# Altium PCB PCB1-sturing.PcbDoc
Units mm, origin at the board's own origin, x right, y up, seen from the top; angles counter-clockwise.
Board outline 210 x 71 mm, 2 copper layers (Top Layer, Bottom Layer), stack 1.671 mm thick; 81 components, 94 nets, 244 pads, 4 vias.
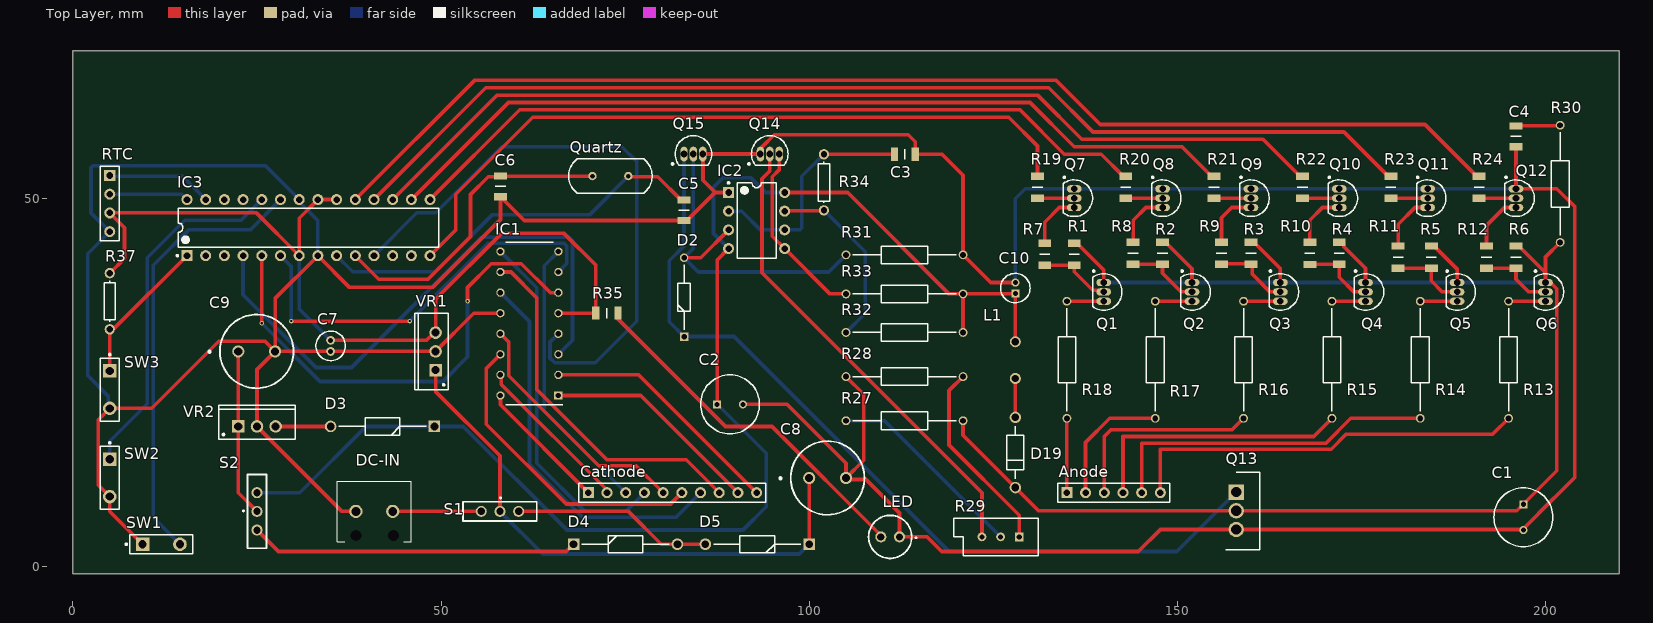
[diagram p0: Top Layer view]
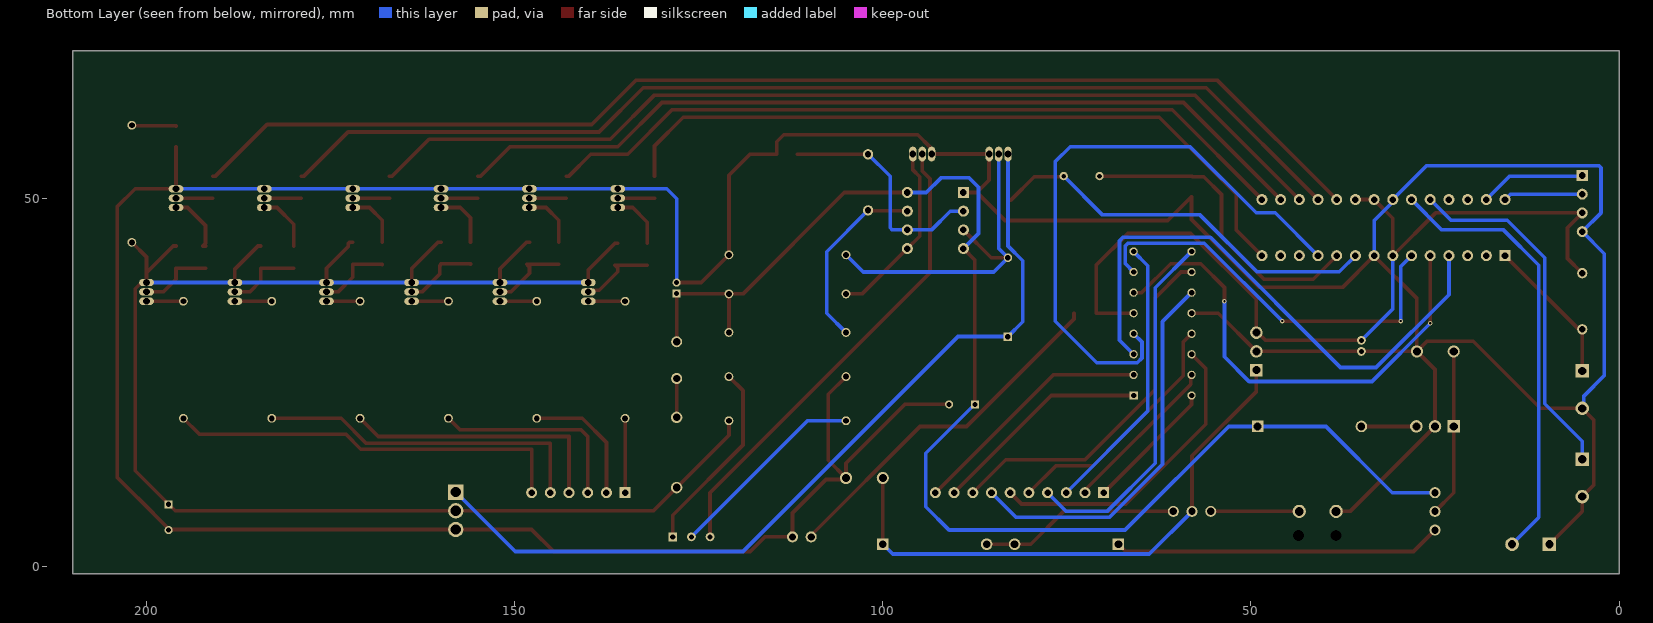
[diagram p1: Bottom Layer view, seen from below]
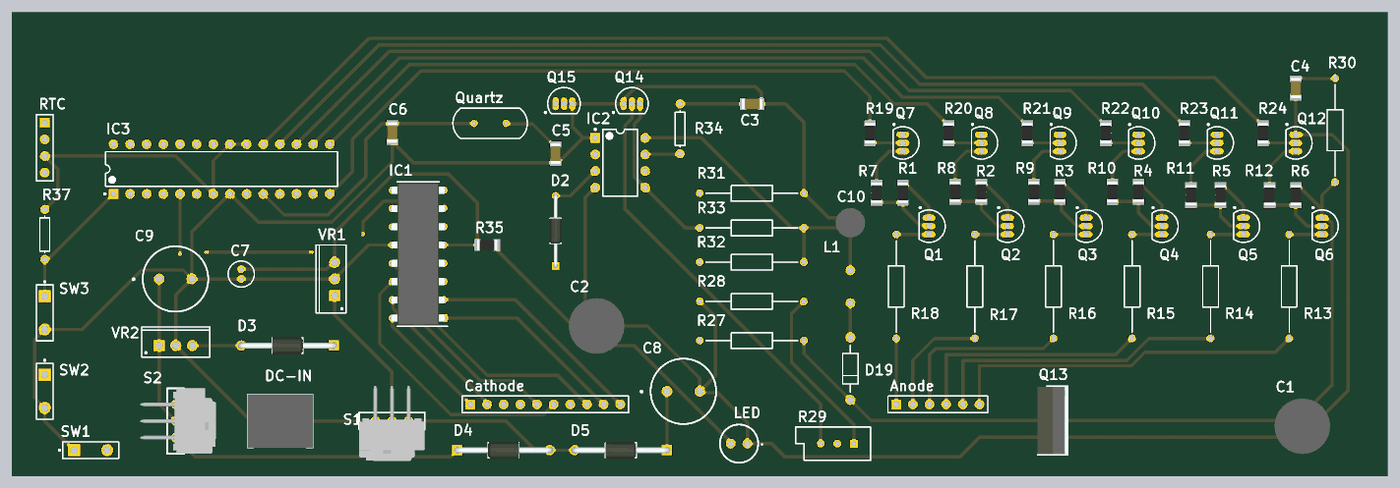
[diagram p2: 3D render of the assembled board from above, using the file's embedded part models]

## Layer stack, top to bottom
Top Solder: solder mask 0.0102, Solder Resist, Dk 3.5
Top Layer: signal copper 0.0356
Dielectric 1: dielectric 1.6, FR-4, Dk 4.8
Bottom Layer: signal copper 0.0356
Bottom Solder: solder mask 0.0102, Solder Resist, Dk 3.5

## Board outline
210,-1 0,-1 0,70 210,70

## Design rules (kind name [scope] priority, off if disabled: settings)
Clearance [All] p1: gap=0.3 ignorepadtopadclearanceinfootprint=TRUE
MinimumSolderMaskSliver [All] p1: minsoldermaskwidth=0.05
PolygonConnect [All] p1: connectstyle=Relief reliefconductorwidth=0.254 reliefentries=4 polygonreliefangle="90 Angle" airgapwidth=0.254
RoutingVias [All] p1: holewidth=0.3 width=0.6 viastyle="Through Hole" minholewidth=0.3 minwidth=0.6 maxholewidth=0.3 maxwidth=0.6
SMDNeckDown [All] p1: percent=60.000
SilkToSolderMaskClearance [IsPad] p1: minsilkscreentomaskgap=0.2 clearancetoexposedcopper=TRUE
SolderMaskExpansion [All] p1: expansion=0.102 istentingtop=FALSE
UnRoutedNet [All] p1: checkbadconnections=TRUE
Width [All] p1: maxlimit=1 minlimit=0.3 preferedwidth=0.5
27 further rules are at their usual default settings.

## Components (designator, comment, footprint, x,y, rotation, side; value= is the part's Value field where it differs from the comment)
Anode "Header 6" HDR1X6 135,10 r0 top
C1 "1uF 350V" CAPPRD350W52D800H1300 197,8.42 r270 top
C2 "470uF 25V" CAPPRD350W52D800H1300 87.5,22 r0 top
C3 "2n2" CAPC3216X95N 113,55.965 r0 top
C4 "47pF" CAPC3216X95N 196,58.4 r270 top
C5 "22pF" CAPC3216X95N 83,48.365 r270 top
C6 "22pF" CAPC3216X95N 58.063,51.6 r90 top
C7 "10uF 16V" ECE-A1CKS100 35,29.94 r180 top
C8 "100uF 50V" 860240675007 102.5,12 r0 top
C9 "100uF 50V" 860240675007 24.96,29.19 r0 top
C10 "10uF 25V" CAPPRD150W50D400H800 128,37.04 r90 top
Cathode "Header 10" HDR1X10 70,10 r0 top
D2 "1N914ATR" DIOAD1068W53L380D172 83,31.206 r90 top
D3 "1N4001" DIOAD1410W86L470D235 49.1,19 r180 top
D4 "1N4001" DIOAD1410W86L470D235 68,3 r0 top
D5 "1N4001" DIOAD1410W86L470D235 100,3 r180 top
D19 "MUR140" ONSC-AXIAL_LEAD-2-59-10_P 128,15.46 r90 top
DC-IN "282836-2" 2828362 38.43,7.46 r0 top
IC1 "SN74141" DIP787W53P279L2176H508Q16N 62,32.984 r180 top
IC2 "NE555P" P0008A 92.86,46.965 r0 top
IC3 "ATmega8-16PU" 28P3 32,46 r90 top
L1 "100 uH 1A" WE-TI_8012B89 128,28 r90 top
LED "HLMP-3301" HLMP-3301 111,4 r90 top
Q1 "MPSA42" TO-92A 140,37.27 r180 top
Q2 "MPSA42" TO-92A 152,37.27 r180 top
Q3 "MPSA42" TO-92A 164,37.27 r180 top
Q4 "MPSA42" TO-92A 175.56,37.27 r180 top
Q5 "MPSA42" TO-92A 188,37.27 r180 top
Q6 "MPSA42" TO-92A 200,37.27 r180 top
Q7 "MPSA42" TO-92A 136,50 r180 top
Q8 "MPSA42" TO-92A 148,50 r180 top
Q9 "MPSA42" TO-92A 160,50 r180 top
Q10 "MPSA42" TO-92A 172,50 r180 top
Q11 "MPSA42" TO-92A 184,50 r180 top
Q12 "MPSA42" TO-92A 196,50 r180 top
Q13 "IRF730" TO254P465X1024X1989-3P 158,10.08 r270 top
Q14 "BC547" TO-92A 94.645,56 r270 top
Q15 "MPSA55" TO-92A 84.27,56 r270 top
Quartz "M16000" FOXSLF/200-20 73,53 r0 top
R1 "100K" RESC3116X65N 136,42.382 r270 top
R2 "100K" RESC3116X65N 148,42.536 r270 top
R3 "100K" RESC3116X65N 160,42.536 r270 top
R4 "100K" RESC3116X65N 172,42.536 r270 top
R5 "100K" RESC3116X65N 184.5,42 r270 top
R6 "100K" RESC3116X65N 196,42 r270 top
R7 "470K" RESC3116X65N 132,42.382 r90 top
R8 "470K" RESC3116X65N 144,42.536 r90 top
R9 "470K" RESC3116X65N 156,42.536 r90 top
R10 "470K" RESC3116X65N 168,42.5 r90 top
R11 "470K" RESC3116X65N 180,42 r90 top
R12 "470K" RESC3116X65N 192,42 r90 top
R13 "15K" RESAD1590W60L630D240 195,36 r270 top
R14 "15K" RESAD1590W60L630D240 183,36 r270 top
R15 "15K" RESAD1590W60L630D240 171,36 r270 top
R16 "15K" RESAD1590W60L630D240 159,36 r270 top
R17 "15K" RESAD1590W60L630D240 147,36 r270 top
R18 "15K" RESAD1590W60L630D240 135,36 r270 top
R19 "33K" RESC3116X65N 131,51.5 r90 top
R20 "33K" RESC3116X65N 143,51.5 r90 top
R21 "33K" RESC3116X65N 155,51.5 r90 top
R22 "33K" RESC3116X65N 167,51.5 r90 top
R23 "33K" RESC3116X65N 179,51.5 r90 top
R24 "33K" RESC3116X65N 191,51.5 r90 top
R27 "220K" RESAD1590W60L630D240 120.9,19.763 r180 top
R28 "470K" RESAD1590W60L630D240 120.9,25.763 r180 top
R29 "RPot" VR5 126,4 r180 top value=1K
R30 "1K" RESAD1590W60L630D240 202,44 r90 top
R31 "1K" RESAD1590W60L630D240 105,42.303 r0 top
R32 "1K" RESAD1590W60L630D240 120.9,31.763 r180 top
R33 "33K" RESAD1590W60L630D240 120.9,37 r180 top
R34 "Res1" AXIAL-0.3 102,52.155 r270 top value=10k
R35 "220" RESC3116X65N 72.531,34.381 r0 top
R37 "Res1" AXIAL-0.3 5,36 r270 top value=1K
RTC "Header 4" HDR1X4 5,53.08 r270 top
S1 "on/sleep" NK236 58,7.46 r180 top
S2 "12-35V/9V" NK236 25,7.46 r270 top
SW1 "SW-PB" SPST-2 12,3 r0 top
SW2 "SW-PB" SPST-2 5,12 r270 top
SW3 "SW-PB" SPST-2 5,24 r270 top
VR1 "L7805ACV" TO220 49.26,29.19 r90 top
VR2 "L7809CV" TO220 25,19 r0 top

## Footprints (in the part's own frame and the unit in brackets; to place one, negate y for a bottom-side part, rotate by r counter-clockwise, add the part's x,y. Pads: shape width x height; smd on the part's side, far side on the other; paste and mask are expansions set on the pad)
28P3 [mm] "28-Pin Plastic Dual In-Line Package (PDIP)"
  rect 1.5x1.5 hole 0.9: 1(-3.81,16.51)
  round 1.5 hole 0.9: 2(-3.81,13.97) 3(-3.81,11.43) 4(-3.81,8.89) 5(-3.81,6.35) 6(-3.81,3.81) 7(-3.81,1.27) 8(-3.81,-1.27) 9(-3.81,-3.81) 10(-3.81,-6.35) 11(-3.81,-8.89) 12(-3.81,-11.43) 13(-3.81,-13.97) 14(-3.81,-16.51) 15(3.81,-16.51) 16(3.81,-13.97) 17(3.81,-11.43) 18(3.81,-8.89) 19(3.81,-6.35) 20(3.81,-3.81) 21(3.81,-1.27) 22(3.81,1.27) 23(3.81,3.81) 24(3.81,6.35) 25(3.81,8.89) 26(3.81,11.43) 27(3.81,13.97) 28(3.81,16.51)
  silkscreen extent -3.93,-17.7 2.65,17.93, body extent -3.6,-17.65 3.6,17.65, height 4.58
2828362 [mm]
  round 1.8 hole 1.2: 1(0,0) 2(5,0)
  round 0.75 hole 1.5: MH1(0,-3.3) MH2(5.08,-3.3)
  silkscreen extent -2.5,-4.1 7.5,4.1, body extent -2.5,-4.1 7.5,4.1, height 10.2
860240675007 [mm]
  round 1.65 hole 1.1: 1(-2.5,0) 2(2.5,0)
  silkscreen extent -6.55,-5 5,5
AXIAL-0.3 [mm] "Axial Device, Thru-Hole; 2 Leads; 0.3 in Pin Spacing"
  round 1.4 hole 0.85: 1(-3.81,0) 2(3.81,0)
  silkscreen extent -2.77,-0.76 2.77,0.76
CAPC3216X95N [mm]
  rect 0.99x1.78 smd: 1(-1.4,0) 2(1.4,0)
  silkscreen extent 0,-0.7 0,0.7, body extent -1.6,-0.8 1.6,0.8, height 0.95
CAPPRD150W50D400H800 [mm]
  rect 1.1x1.1 hole 0.7: 1(0,0)
  round 1.1 hole 0.7: 2(1.5,0)
  silkscreen extent -1.25,-2 2.75,2, body extent -1.5,-2.25 3,2.25, height 8
CAPPRD350W52D800H1300 [mm]
  rect 1.1x1.1 hole 0.7: 1(0,0)
  round 1.1 hole 0.7: 2(3.5,0)
  silkscreen extent -2.25,-4 5.75,4, body extent -2.5,-4.25 6,4.25, height 13
DIOAD1068W53L380D172 [mm]
  rect 1.15x1.15 hole 0.75: 1(0,0)
  round 1.15 hole 0.75: 2(10.7,0)
  silkscreen extent 0.92,-0.86 9.78,0.86, body extent -0.26,-0.95 10.95,0.95, height 1.9
DIOAD1410W86L470D235 [mm]
  rect 1.575x1.575 hole 1.05: 1(0,0)
  round 1.575 hole 1.05: 2(14.1,0)
  silkscreen extent 1.14,-1.18 12.96,1.18, body extent -0.43,-1.35 14.53,1.35, height 2.69
DIP787W53P279L2176H508Q16N [mil]
  rect 44.61x44.61 hole 28.86: 1(-155,385)
  round 44.61 hole 28.86: 2(-155,275) 3(-155,165) 4(-155,55) 5(-155,-55) 6(-155,-165) 7(-155,-275) 8(-155,-385) 9(155,-385) 10(155,-275) 11(155,-165) 12(155,-55) 13(155,55) 14(155,165) 15(155,275) 16(155,385)
  silkscreen extent -177,-435 127,435, body extent -160,-428 160,428, height 200
ECE-A1CKS100 [mm]
  round 1.2 hole 0.7: 1(0,-0.75) 2(0,0.75)
  silkscreen extent -2,-2 2,2
FOXSLF/200-20 [mm]
  round 1.13 hole 0.63: 1(-2.44,0) 2(2.44,0)
  silkscreen extent -5.68,-2.33 5.68,2.33
HDR1X4 [mm] "Connector; Header; 4 Position"
  rect 1.5x1.5 hole 0.9: 1(0,0)
  round 1.5 hole 0.9: 2(2.54,0) 3(5.08,0) 4(7.62,0)
  silkscreen extent -1.27,-1.27 8.89,1.27
HDR1X6 [mm] "Connector; Header; 6 Position"
  rect 1.5x1.5 hole 0.9: 1(0,0)
  round 1.5 hole 0.9: 2(2.54,0) 3(5.08,0) 4(7.62,0) 5(10.16,0) 6(12.7,0)
  silkscreen extent -1.27,-1.27 13.97,1.27
HDR1X10 [mm] "Connector; Header; 10 Position"
  rect 1.5x1.5 hole 0.9: 1(0,0)
  round 1.5 hole 0.9: 2(2.54,0) 3(5.08,0) 4(7.62,0) 5(10.16,0) 6(12.7,0) 7(15.24,0) 8(17.78,0) 9(20.32,0) 10(22.86,0)
  silkscreen extent -1.27,-1.27 24.13,1.27
HLMP-3301 [mm]
  round 1.5 hole 0.98: 1(0,-1.27) 2(0,1.27)
  silkscreen extent -2.92,-3.56 2.92,2.92
NK236 [mm]
  round 1.5 hole 1: 1(0,0) 2(-2.54,0) 3(2.54,0)
  silkscreen extent -5,-1.91 5,1.3, body extent -5,-5.4 5,6.1, height 1.3
ONSC-AXIAL_LEAD-2-59-10_P [mm] "AXIAL, 2-Leads, Diameter 2.35mm"
  round 1.55 hole 1.05: 1(-4.77,0) 2(4.77,0)
  silkscreen extent -3.6,-1.17 3.6,1.18
P0008A [mm] "DIP, 8-Leads, Body 10.15x6.6mm, Pitch 2.54mm"
  rect 1.5x1.5 hole 0.9: 1(-3.81,3.81)
  round 1.5 hole 0.9: 2(-3.81,1.27) 3(-3.81,-1.27) 4(-3.81,-3.81) 5(3.81,-3.81) 6(3.81,-1.27) 7(3.81,1.27) 8(3.81,3.81)
  silkscreen extent -3.93,-5.1 2.65,5.23, body extent -3.95,-5.07 3.95,5.07, height 5.08
RESAD1590W60L630D240 [mm]
  round 1.2 hole 0.8: 1(0,0) 2(15.9,0)
  silkscreen extent 0.95,-1.2 14.95,1.2, body extent 0,0 0,0
RESC3116X65N [mm]
  rect 1x1.75 smd: 1(-1.5,0) 2(1.5,0)
  silkscreen extent 0,-0.7 0,0.7, body extent -1.55,-0.8 1.55,0.8, height 0.65
SPST-2 [mm] "Switch; 2 Leads"
  rect 1.85x1.85 hole 1.1: 1(-2.54,0)
  round 1.85 hole 1.1: 2(2.54,0)
  silkscreen extent -4.89,-1.27 4.28,1.27
TO220 [mm] "TO, Thru-Hole, Vertical, Heatsink Mounted; 3 In-Line Leads; Pitch 2.54 mm"
  rect 1.7x1.7 hole 1.1: 1(-2.54,0)
  round 1.7 hole 1.1: 2(0,0) 3(2.54,0)
  silkscreen extent -5.2,-1.75 5.2,2.85, body extent -5.25,-1.8 5.25,2.9, height 19.7
TO254P465X1024X1989-3P [mm]
  rect 2.085x2.085 hole 1.39: 1(0,0)
  round 2.085 hole 1.39: 2(2.54,0) 3(5.08,0)
  silkscreen extent -2.72,-1.42 7.8,3.22, body extent -2.58,-1.43 7.66,3.22, height 18.77
TO-92A [mm] "TO, Flat Index; 3 In-Line, Axial Leads; Body Dia. 4.5mm; Leads 0.51 x 0.48 mm (max)"
  oval 2x1 hole 0.9: 1(0,-1.27) 2(0,0) 3(0,1.27)
  silkscreen extent -2.48,-2.95 1.5,2.48, body extent -2.48,-2.5 1.5,2.5, height 6.86
VR5 [mm] "Thru-Hole; 3 Leads"
  rect 1.2x1.2 hole 0.7: 1(-2.54,0)
  round 1.2 hole 0.7: 2(0,0) 3(2.54,0)
  silkscreen extent -5.08,-2.54 6.35,2.54
WE-TI_8012B89 [mm]
  round 1.5 hole 1: 1(-2.5,0) 2(2.5,0)

## Part data
Anode: "Header, 6-Pin", LatestRevisionDate=17-Jul-2002, LatestRevisionNote="Re-released for DXP Platform.", Publisher="Altium Limited"
C1 C2: library part 860131274001, "Capacitor Polarised", Manufacturer_Name="Wurth Elektronik", Mouser Part Number=710-860131274001, RS Part Number=1636251, Datasheet Link=http://katalog.we-online.com/pbs/datasheet/860131274001.pdf, Height=13mm, Manufacturer_Part_Number=860131274001, Mouser Price/Stock=https://www.mouser.com/Search/Refine.aspx?Keyword=710-860131274001, RS Price/Stock=http://uk.rs-online.com/web/p/products/1636251
C3: library part CC1206KRX7R9BB471, "Capacitor", Manufacturer_Name="YAGEO (PHYCOMP)", Mouser Part Number=603-CC126KRX7R9BB471, Datasheet Link=https://componentsearchengine.com/Datasheets/1/CC1206KRX7R9BB471.pdf, Height=0.95mm, Manufacturer_Part_Number=CC1206KRX7R9BB471, Mouser Price/Stock=https://www.mouser.com/Search/Refine.aspx?Keyword=603-CC126KRX7R9BB471
C4 C5 C6: library part CC1206JRNPO9BN220, "Capacitor", Manufacturer_Name="YAGEO (PHYCOMP)", Datasheet Link=http://uk.rs-online.com/web/p/products/6698482, Height=0.95mm, Manufacturer_Part_Number=CC1206JRNPO9BN220
C7: library part ECE-A1CKS100, "Capacitor", Manufacturer_Name=Panasonic, Mouser Part Number=667-ECE-A1CKS100, Allied_Number=70067880, Allied Price/Stock=http://www.alliedelec.com/panasonic-ecea1cks100/70067880/, Datasheet Link=http://www.mouser.com/ds/2/315/ABA0000C1050-951367.pdf, Manufacturer_Part_Number=ECE-A1CKS100, Mouser Price/Stock=https://www.mouser.com/Search/Refine.aspx?Keyword=667-ECE-A1CKS100
C8 C9: library part 860240675007, "Capacitor", Manufacturer_Name="Wurth Elektronik", Mouser Part Number=710-860240675007, RS Part Number=1636310, Datasheet Link=http://uk.rs-online.com/webdocs/135a/0900766b8135acdf.pdf, Manufacturer_Part_Number=860240675007, Mouser Price/Stock=https://www.mouser.com/Search/Refine.aspx?Keyword=710-860240675007, RS Price/Stock=http://uk.rs-online.com/web/p/products/1636310
C10: library part EEA-FC1E100, "Capacitor Polarised", Manufacturer_Name=Panasonic, Mouser Part Number=667-EEA-FC1E100, Allied_Number=70256144, Allied Price/Stock=https://www.alliedelec.com/panasonic-eea-fc1e100/70256144/, Datasheet Link=https://industrial.panasonic.com/cdbs/www-data/pdf/RDF0000/ABA0000C1209.pdf, Height=8mm, Manufacturer_Part_Number=EEA-FC1E100, Mouser Price/Stock=https://www.mouser.com/Search/Refine.aspx?Keyword=667-EEA-FC1E100
Cathode: "Header, 10-Pin", LatestRevisionDate=17-Jul-2002, LatestRevisionNote="Re-released for DXP Platform.", Publisher="Altium Limited"
D2: "Diode", Manufacturer_Name="Fairchild Semiconductor", Mouser Part Number=512-1N914ATR, RS Part Number=7044004P, Datasheet Link=https://www.fairchildsemi.com/datasheets/1N/1N914A.pdf, Manufacturer_Part_Number=1N914ATR, Mouser Price/Stock=https://www.mouser.com/Search/Refine.aspx?Keyword=512-1N914ATR, RS Price/Stock=http://uk.rs-online.com/web/p/products/7044004P
D3 D4 D5: "Diode", Manufacturer_Name=MULTICOMP, Datasheet Link=http://www.farnell.com/datasheets/58590.pdf, Manufacturer_Part_Number=1N4001
D19: library part CMP-0902-00130-1, "SWITCHMODE(TM) Power Rectifier, 2-Pin Axial_Lead, Pb-Free, Bulk Box", Manufacturer="On Semiconductor", ComponentLink1Description="Manufacturer URL", ComponentLink1URL=http://www.onsemi.com/, ComponentLink2Description=Datasheet, ComponentLink2URL=http://www.onsemi.com/pub_link/Collateral/MUR120-D.PDF, ComponentLink3Description="Package Specification", ComponentLink3URL=http://www.onsemi.cn/pub_link/Collateral/59-10.PDF, DatasheetVersion="Rev. 12", IFSM Max (A)=35, Mounting Technology="Through Hole", PackageDescription="2-Pin, Axial Lead, Diameter 2.35 mm", PackageReference=AXIAL_LEAD-2-59-10, PackageVersion="Rev. U, 02/2005", Packing="Bulk Box", PartNumber=MUR140, RoHS=TRUE, Type=Ultrafast, VRRM Max (V)=400
DC-IN: "Connector", Manufacturer_Name="TE CONNECTIVITY / BUCHANAN", Allied_Number=70086275, Allied Price/Stock=https://www.alliedelec.com/teconnectivity-282836-2/70086275/, Datasheet Link=https://www.te.com/commerce/DocumentDelivery/DDEController?Action=showdoc&DocId=Customer+Drawing%7F282836%7FJ%7Fpdf%7FEnglish%7FENG_CD_282836_J.pdf%7F282836-2, Height=10.2mm, Manufacturer_Part_Number=282836-2
IC1: "Integrated Circuit", Manufacturer_Name="Texas Instruments", Datasheet Link=http://pdf1.alldatasheet.com/datasheet-pdf/view/115763/TI/SN74141.html, Height=5.08mm, Manufacturer_Part_Number=SN74141
IC2: library part CMP-2000-04954-1, "Precision Timer, 4.5 to 16 V, 0 to 70 degC, 8-Pin DIP, Pb-Free, Tube", Manufacturer=TexasInstruments, Maximum High Level Output Current=-200mA, Maximum Low Level Output Current=200mA, Operating Supply Voltage=5, Package=8PDIP, Package Description="8-Pin Double In-line Package, Body 9.59 x 6.35 mm, Pitch 2.54 mm", Package Reference=P8, Category=Timer, Datasheet URL=http://www.ti.com/general/docs/lit/getliterature.tsp?genericPartNumber=NE555&fileType=pdf, Datasheet Version="Rev. I, 09/2014", Manufacturer URL=http://www.ti.com/, Number of Internal Timers=1, Package URL=http://www.ti.com/lit/ml/mpdi001b/mpdi001b.pdf, Packaging=Rail/Tube, Rad Hard=No, Type=Standard
IC3: library part CMP-0095-00372-1, "8-bit AVR Microcontroller, 4.5-5.5V, 16MHz, 8KB Flash, 512 Bytes EEPROM, 1KB SRAM, 28-pin PDIP, Industrial Grade (-40°C to 85°C)", ComponentLink1Description="Manufacturer URL", ComponentLink1URL=http://www.atmel.com/, ComponentLink2Description=ATmega8(L), ComponentLink2URL=http://www.atmel.com/dyn/resources/prod_documents/doc2486.pdf, ComponentLink3Description="ATmega8(L) Summary", ComponentLink3URL=http://www.atmel.com/dyn/resources/prod_documents/2486S.pdf, DatasheetVersion="revZ, Feb-2011", PackageDescription="28-lead (0.300\"/7.62mm Wide) Plastic Dual Inline Package (PDIP)", PackageReference=28P3, PackageVersion="revB, Sep-2001"
L1: library part 744743101, "Inductor", Manufacturer_Name="Wurth Elektronik", RS Part Number=4890071, Manufacturer_Part_Number=744743101, RS Price/Stock=http://uk.rs-online.com/web/p/products/4890071
LED: "LED", Manufacturer_Name="Avago Technologies", Mouser Part Number=630-HLMP-3301, RS Part Number=1783094, Datasheet Link=https://docs.broadcom.com/docs/AV02-1558EN, Manufacturer_Part_Number=HLMP-3301, Mouser Price/Stock=https://www.mouser.com/Search/Refine.aspx?Keyword=630-HLMP-3301, RS Price/Stock=http://uk.rs-online.com/web/p/products/1783094
Q1 Q2 Q3 Q4 Q5 Q6 Q15: library part 2N3906, "PNP General Purpose Amplifier", ComponentLink1Description="Manufacturer Link", ComponentLink1URL=http://www.fairchildsemi.com/, ComponentLink2Description=Datasheet, ComponentLink2URL=http://www.fairchildsemi.com/ds/2N%2F2N3906.pdf, DatasheetVersion=1997, LatestRevisionDate=15-Jan-2003, LatestRevisionNote="PCB Footprint 'BCY-W3/D4.7' replaced", PackageDescription="TO, Flat Index; 3 In-Line, Axial Leads; Body Dia. 4.5mm; Leads 0.51 x 0.48 mm (max)", PackageReference=TO-92A, PackageVersion=Sep-1998, Published=8-Jun-2000, Publisher="Altium Limited"
Q7 Q8 Q9 Q10 Q11 Q12 Q14: library part 2N3904, "NPN General Purpose Amplifier", ComponentLink1Description="Manufacturer Link", ComponentLink1URL=http://www.fairchildsemi.com/, ComponentLink2Description=Datasheet, ComponentLink2URL=http://www.fairchildsemi.com/ds/2N%2F2N3904.pdf, DatasheetVersion=1997, LatestRevisionDate=15-Jan-2003, LatestRevisionNote="PCB Footprint 'BCY-W3/D4.7' replaced", PackageDescription="TO, Flat Index; 3 In-Line, Axial Leads; Body Dia. 4.5mm; Leads 0.51 x 0.48 mm (max)", PackageReference=TO-92A, PackageVersion=Sep-1998, Published=8-Jun-2000, Publisher="Altium Limited"
Q13: "Transistor", Manufacturer_Name=STMicroelectronics, Mouser Part Number=511-IRF730, Datasheet Link=https://componentsearchengine.com/Datasheets/1/IRF730.pdf, Height=4.65mm, Manufacturer_Part_Number=IRF730, Mouser Price/Stock=https://www.mouser.com/Search/Refine.aspx?Keyword=511-IRF730
Quartz: library part FOXSLF_080, "Crystal or Oscillator", Manufacturer_Name=Fox, Manufacturer_Part_Number=FOXSLF/080, Mouser Part Number=559-FOXS080-LF, RS Part Number=1734724, Datasheet Link=https://www.foxonline.com/pdfs/C4ST.pdf, Mouser Price/Stock=https://www.mouser.com/Search/Refine.aspx?Keyword=559-FOXS080-LF, RS Price/Stock=http://uk.rs-online.com/web/p/products/1734724
R1 R2 R3 R4 R5 R6 R7 R8 R9 R10 R11 R12 R19 R20 R21 R22 R23 R24 R35: library part RC1206JR-07_10KL, "Resistor", Manufacturer_Name="YAGEO (PHYCOMP)", Manufacturer_Part_Number="RC1206JR-07 10KL", Datasheet Link=https://www.sos.sk/productdata/35/10/4/35104/RC1206.pdf, Height=0.65mm
R13 R14 R15 R16 R17 R18 R27 R28 R30 R31 R32 R33: library part MF0207FTE52-10K, "Resistor", Manufacturer_Name="YAGEO (PHYCOMP)", Mouser Part Number=603-MF0207FTE52-10K, Datasheet Link="http://www.mouser.com/ds/2/447/Yageo LR_MF0_2013-775182.pdf", Manufacturer_Part_Number=MF0207FTE52-10K, Mouser Price/Stock=https://www.mouser.com/Search/Refine.aspx?Keyword=603-MF0207FTE52-10K
R29: "Potentiometer", LatestRevisionDate=17-Jul-2002, LatestRevisionNote="Re-released for DXP Platform.", PackageDescription="Variable Resistor, Thru-Hole; 3 Leads", PackageReference=VR5, Published=8-Jun-2000, Publisher="Altium Limited", Set Position=0.5, Sim Note="Enter the Resistance value and the set point into parameter fields."
R34 R37: "Resistor", LatestRevisionDate=17-Jul-2002, LatestRevisionNote="Re-released for DXP Platform.", PackageDescription="Axial Device, Thru-Hole; 2 Leads; 0.3 in Pin Spacing", PackageReference=AXIAL-0.3, Published=8-Jun-2000, Publisher="Altium Limited"
RTC: "Header, 4-Pin", LatestRevisionDate=17-Jul-2002, LatestRevisionNote="Re-released for DXP Platform.", Publisher="Altium Limited"
S1 S2: library part NK236, "Switch", Manufacturer_Name=Apem, Mouser Part Number=642-NK236, RS Part Number=1810038, Datasheet Link=https://componentsearchengine.com/Datasheets/1/NK236.pdf, Manufacturer_Part_Number=NK236, Mouser Price/Stock=https://www.mouser.com/Search/Refine.aspx?Keyword=642-NK236, RS Price/Stock=http://uk.rs-online.com/web/p/products/1810038
SW1 SW2 SW3: "Switch", LatestRevisionDate=17-Jul-2002, LatestRevisionNote="Re-released for DXP Platform.", PackageDescription="Switch; 2 Leads", PackageReference=SPST-2, Published=24-Mar-1999, Publisher="Altium Limited"
VR1: library part CMP-0244-00484-1, "Positive Voltage Regulator, 5V, 3-Pin TO-220", ComponentLink1Description="Manufacturer URL", ComponentLink1URL=http://www.st.com, ComponentLink2Description=Datasheet, ComponentLink2URL=http://www.st.com/internet/com/TECHNICAL_RESOURCES/TECHNICAL_LITERATURE/DATASHEET/CD00000444.pdf, ComponentLink3Description="Package Specification", ComponentLink3URL=http://www.st.com/internet/com/TECHNICAL_RESOURCES/TECHNICAL_LITERATURE/PACKAGE_INFORMATION/CD00004649.pdf, DatasheetVersion=16/11/2011, PackageDescription="TO, Thru-Hole, Vertical, Heatsink Mounted; 3 In-Line Leads; Pitch 2.54 mm", PackageReference=TO220, PackageVersion=ver3.0
VR2: library part CMP-0244-00459-1, "Positive Voltage Regulator, 9V, 3-Pin TO-220", ComponentLink1Description="Manufacturer URL", ComponentLink1URL=http://www.st.com, ComponentLink2Description=Datasheet, ComponentLink2URL=http://www.st.com/internet/com/TECHNICAL_RESOURCES/TECHNICAL_LITERATURE/DATASHEET/CD00000444.pdf, ComponentLink3Description="Package Specification", ComponentLink3URL=http://www.st.com/internet/com/TECHNICAL_RESOURCES/TECHNICAL_LITERATURE/PACKAGE_INFORMATION/CD00004649.pdf, DatasheetVersion=16/11/2011, PackageDescription="TO, Thru-Hole, Vertical, Heatsink Mounted; 3 In-Line Leads; Pitch 2.54 mm", PackageReference=TO220, PackageVersion=ver3.0

## Via types
v1: diameter 0.6, hole 0.3, Top Layer to Bottom Layer, 4 vias

## Nets (pads, with @x,y where several pads share a name; then routed paths per layer and width w, separated by ;. In a path a pad name is that pad's centre, name@x,y a point inside that pad or via, vN(x,y) a via of type N, cw(c..) or ccw(c..) an arc to the next point about the centre after c; other vN are vias at no path point)
1: C1.2 C2.2 C3.2 C4.2 C5.2 C6.1 C7.2 C8.2 C9.2 C10.2 DC-IN.1 IC1.12 IC2.1 IC3.8 IC3.22 LED.1 Q7.1 Q8.1 Q9.1 Q10.1 Q11.1 Q12.1 Q13.3 Q14.1 Q15.3 R28.2 R31.2 RTC.4 SW1.1 SW2.2 SW3.2 VR1.2 VR2.2 | length 615.2
  Top Layer w0.5: SW1.1 5,7.46 SW2.2 3.46,11 3.46,19.92 SW3.2 10.697,21.46 19.802,30.565 26.085,30.565 C9.2 ; DC-IN.1@38.43,8 37.89,7.46 36.54,7.46 VR2.2 25,26.73 C9.2 ; IC1.12 54.451,34.381 VR1.2 C7.2 C9.2 ; IC2.1 87.225,50.775 ; C2.2 97,22 105,14 C8.2 ; R28.2 107.4,23.363 107.4,14.4 C8.2 ; LED.1 112.27,7.23 107.72,11.78 105.22,11.78 C8.2 ; LED.1@113,4 116,4 118,2 144.7,2 147.7,5 Q13.3 196.9,5 C1.2@196.91,5.01 ; C10.2 124.663,38.54 R31.2 120.9,53.1 118.035,55.965 C3.2 114.4,57.67 113.47,58.6 95.26,58.6 93.595,56.935 93.595,56.855 93.375,56.635 Q14.1 Q15.3 85.575,55.965 85.575,52.425 87.225,50.775 ; C4.2 Q12.1 201.55,51.27 204,48.82 204,12.1 C1.2@196.91,5.01 ; 201.1,9.2 C1.2@196.91,5.01 ; C9.2 27.46,36.38 IC3.8 37.574,37.885 48.849,37.885 58.063,47.099 C6.1 61.298,46.965 C5.2 83.395,46.965 87.205,50.775 87.225,50.775
  Bottom Layer w0.5: SW3.2 4.778,21.682 4.778,23.135 2,25.913 2,42.46 RTC.4 2.46,48 2.46,54.132 2.753,54.425 26.115,54.425 IC3.22 30.73,49.49 33.27,46.95 IC3.8 ; C10.2 128,49.915 129.355,51.27 Q7.1 Q8.1 Q9.1 Q10.1 Q11.1 Q12.1
+5: C7.1 IC1.5 IC3.7 IC3.20 IC3.21 R35.1 R37.1 RTC.3 VR1.3 | length 120.6
  Top Layer w0.5: R37.1 7,41.81 7,46 RTC.3 24.92,48 IC3.7 30.73,47.27 IC3.21 IC3.20 ; C7.1 48.037,30.69 49.077,31.73 VR1.3 49.26,36.26 58.22,45.22 66.686,45.22 71.031,40.875 R35.1 IC1.5
  Bottom Layer w0.5: IC3.7 30.73,34.96 C7.1
"NetAnode in_1": 
"NetAnode in_2": 
"NetAnode in_3": 
"NetAnode in_4": 
"NetAnode in_5": 
"NetAnode in_6": 
NetAnode_1: Anode.1 R18.2 | length 10.1
  Top Layer w0.5: Anode.1 R18.2
NetAnode_2: Anode.2 R17.2 | length 17.6
  Top Layer w0.5: Anode.2 137.54,16.81 140.83,20.1 R17.2
NetAnode_3: Anode.3 R16.2 | length 27.6
  Top Layer w0.5: Anode.3 140.08,17.62 140.992,18.532 157.432,18.532 R16.2
NetAnode_4: Anode.4 R15.2 | length 37
  Top Layer w0.5: Anode.4 142.62,17.62 168.52,17.62 R15.2
NetAnode_5: Anode.5 R14.2 | length 46
  Top Layer w0.5: Anode.5 145.16,16.716 170.184,16.716 173.568,20.1 R14.2
NetAnode_6: Anode.6 R13.2 | length 54.9
  Top Layer w0.5: Anode.6 147.7,15.916 170.916,15.916 172.958,17.958 192.858,17.958 R13.2
NetC1_1: C1.1 D19.1 Q1.1 Q2.1 Q3.1 Q4.1 Q5.1 Q6.1 Q13.2 R1.1 R2.1 R3.1 R4.1 R5.1 R6.1 R27.1 R30.1 | length 223.3
  Top Layer w0.5: R27.1 120.9,17.79 D19.1 131.15,7.54 Q13.2 196.12,7.54 C1.1 201.55,12.97 201.55,37.705 200.873,38.382 200.793,38.382 200.635,38.54 Q6.1 200,39.875 ; R1.1 136.375,43.882 140,40.257 Q1.1 ; R2.1 148.375,44.036 152,40.411 Q2.1 ; R3.1 160.375,44.036 164,40.411 Q3.1 ; R4.1 172.375,44.036 172.625,43.786 172.625,43.411 175.56,40.476 Q4.1 ; R5.1 184.875,43.5 188,40.375 Q5.1 ; R6.1 196.375,43.5 200,39.875 ; R30.1 200,42 200,39.875
  Bottom Layer w0.5: Q1.1 Q2.1 Q3.1 Q4.1 Q5.1 Q6.1
NetC2_1: C2.1 C10.1 D3.1 IC2.4 IC2.8 L1.2 R32.1 R33.1 S2.2 | length 187.5
  Top Layer w0.5: C2.1 87.5,41.605 IC2.4 ; IC2.8 105.225,50.775 119,37 R33.1 ; R32.1 R33.1 ; L1.2 C10.1 127.98,37.02 120.92,37.02 R33.1
  Bottom Layer w0.5: S2.2 30.81,10 39.81,19 D3.1 53.01,19 67.09,4.92 90.994,4.92 94.16,8.086 94.16,15.34 C2.1 ; IC2.4 87,45.205 87,51.5 88.258,52.758 92.102,52.758 94.085,50.775 IC2.8
NetC3_1: C3.1 IC2.2 IC2.6 R34.1 | length 31.9
  Top Layer w0.5: R34.1 C3.1
  Bottom Layer w0.5: IC2.2 90.835,48.235 93.375,45.695 IC2.6 98.695,45.695 99,46 99,52.965 R34.1
NetC4_1: C4.1 R30.2 | length 6
  Top Layer w0.5: C4.1 196.05,59.85 201.95,59.85 R30.2
NetC5_1: C5.1 IC3.9 Quartz.2 | length 54.8
  Top Layer w0.5: Quartz.2 75.517,52.923 79.447,52.923 82.605,49.765 C5.1
  Bottom Layer w0.5: IC3.9 38,40 49.174,40 56.904,47.73 70.17,47.73 Quartz.2
NetC6_2: C6.2 IC3.10 Quartz.1 | length 42.7
  Top Layer w0.5: IC3.10 41.54,39 48.237,39 54,44.763 54,50.5 56.423,52.923 57.986,52.923 C6.2 Quartz.1
NetC8_1: C8.1 D5.1 S1.1 VR1.1 | length 76.8
  Top Layer w0.5: VR1.1 49.26,23.74 58,15 S1.1 ; D5.1 C8.1
  Bottom Layer w0.5: S1.1 63.798,1.662 98.663,1.662 D5.1
NetC9_1: C9.1 S2.1 VR2.1 | length 22.8
  Top Layer w0.5: C9.1 VR2.1 22.46,10 S2.1
NetCathode_1: Cathode.1 IC1.16 | length 18.1
  Top Layer w0.5: IC1.16 58.063,21.937 69.76,10.24 Cathode.1@69.76,10
NetCathode_2: Cathode.2 IC1.15 | length 21.9
  Top Layer w0.5: IC1.15 58.184,25.878 58.184,24.707 72.3,10.591 Cathode.2@72.3,10
NetCathode_3: Cathode.3 IC1.8 | length 38.2
  Bottom Layer w0.5: IC1.8 64,40.826 64,21.08 Cathode.3
NetCathode_4: Cathode.4 IC1.9 | length 49.1
  Bottom Layer w0.5: IC1.9 63,37.826 63,14 69.54,7.46 75.08,7.46 77.38,9.76 Cathode.4@77.38,10
NetCathode_5: Cathode.5 IC1.13 | length 33.8
  Top Layer w0.5: IC1.13 59.192,30.458 59.192,25.888 71.411,13.669 76.491,13.669 80.04,10.12 80.04,10 Cathode.5@80.04,9.88
NetCathode_6: Cathode.6 IC1.14 | length 41.9
  Top Layer w0.5: IC1.14 56.144,26.874 56.144,19.308 66.989,8.462 81.162,8.462 82.46,9.76 Cathode.6@82.46,10
NetCathode_7: Cathode.7 IC1.11 | length 52.5
  Bottom Layer w0.5: IC1.11 62,33.238 62,13.869 69.209,6.66 81.9,6.66 Cathode.7
NetCathode_8: Cathode.8 IC1.10 | length 49.4
  Top Layer w0.5: IC1.10 59.489,39.969 63.002,36.456 63.002,23.998 72.531,14.469 83.311,14.469 Cathode.8
NetCathode_9: Cathode.9 IC1.1 | length 29.8
  Top Layer w0.5: IC1.1 77.115,23.205 90.08,10.24 Cathode.9@90.08,10
NetCathode_10: Cathode.10 IC1.2 | length 33.5
  Top Layer w0.5: IC1.2 76.861,25.999 Cathode.10
NetD2_1: D2.1 Q13.1 Q15.1 | length 116.9
  Bottom Layer w0.5: Q15.1 83,43.5 81,41.5 81,33.206 D2.1 89.794,31.206 119,2 149.92,2 Q13.1
NetD2_2: D2.2 IC2.3 Q15.2 R31.1 | length 46
  Top Layer w0.5: D2.2 85.261,41.906 IC2.3
  Bottom Layer w0.5: Q15.2 84.27,43.176 D2.2 84.937,39.969 102.666,39.969 R31.1
NetD3_2: D3.2 VR2.3 | length 7.5
  Top Layer w0.5: VR2.3 D3.2
NetD4_1: D4.1 S2.3 | length 44.6
  Top Layer w0.5: S2.3 27.92,2 67,2 D4.1
NetD4_2: D4.2 D5.2 S1.2 | length 27.2
  Top Layer w0.5: S1.2 75.46,7.46 79.92,3 D4.2 D5.2
NetD19_2: D19.2 L1.1 | length 5.3
  Top Layer w0.5: D19.2 L1.1
NetDC-IN_2: DC-IN.2 S1.3 | length 12.5
  Top Layer w0.5: DC-IN.2 S1.3 ; DC-IN.2@43.43,7.54 DC-IN.2@43.43,8
NetIC1_3: IC1.3 IC3.4 | length 77.9
  Bottom Layer w0.5: IC3.4 23.11,36.89 33,27 37.826,27 55.506,44.68 67.374,44.68 67.854,44.2 67.854,30.71 IC1.3
NetIC1_4: IC1.4 IC3.11 | length 82.5
  Bottom Layer w0.5: IC3.11 46.71,48.01 49.28,48.01 58.27,57 74.54,57 76.565,54.975 76.565,33.278 70.952,27.665 65.44,27.665 64.805,28.3 64.805,30.455 IC1.4
NetIC1_6: IC1.6 IC3.5 | length 66.5
  Top Layer w0.5: v1(25.65,33) IC3.5 ; v1(53.601,36) 53.601,37.885 56.817,41.101 60.904,41.101 64.83,37.175 IC1.6
  Bottom Layer w0.5: v1(25.65,33) 33.551,25.099 50.251,25.099 53.601,28.449 v1(53.601,36)
NetIC1_7: IC1.7 IC3.6 | length 55.4
  Top Layer w0.5: v1(29.651,33.303) v1(45.755,33.303)
  Bottom Layer w0.5: IC3.6 29.651,40.729 v1(29.651,33.303) ; v1(45.755,33.303) 56.331,43.88 66.71,43.88 67.054,43.536 67.054,41.086 IC1.7
NetIC2_5: IC2.5 Q14.3 R33.2 | length 24.8
  Top Layer w0.5: Q14.3 95.915,53.838 95,52.923 95,44.825 IC2.5 102.825,37 R33.2
NetIC2_7: IC2.7 R32.2 R34.2 | length 25.4
  Top Layer w0.5: IC2.7 96.725,48.29 101.945,48.29 R34.2
  Bottom Layer w0.5: R34.2 107.618,42.727 107.618,34.381 R32.2
NetIC3_1: IC3.1 R37.2 SW3.1 | length 20.3
  Top Layer w0.5: SW3.1 R37.2 5.172,32.362 5.662,32.362 IC3.1
NetIC3_14: IC3.14 R19.2 | length 98.8
  Top Layer w0.5: IC3.14 52,45.68 52,50.542 62.458,61 127.1,61 131,57.1 R19.2
NetIC3_15: IC3.15 R20.2 | length 103.3
  Top Layer w0.5: IC3.15 60.7,62 128.625,62 134.66,55.965 139.66,55.965 142.625,53 R20.2
NetIC3_16: IC3.16 R21.2 | length 118.6
  Top Layer w0.5: IC3.16 59.16,63 130,63 136,57 150.625,57 154.625,53 R21.2
NetIC3_17: IC3.17 R22.2 | length 134
  Top Layer w0.5: IC3.17 57.62,64 131.009,64 137.009,58 161.625,58 166.625,53 R22.2
NetIC3_18: IC3.18 R23.2 | length 149.4
  Top Layer w0.5: IC3.18 56.08,65 132.54,65 138.54,59 172.625,59 178.625,53 R23.2
NetIC3_19: IC3.19 R24.2 | length 164.7
  Top Layer w0.5: IC3.19 54.54,66 133.54,66 139.54,60 183.625,60 190.625,53 R24.2
NetIC3_23: IC3.23 SW1.2 | length 60.4
  Bottom Layer w0.5: SW1.2 10.894,6.646 10.894,40.894 15.695,45.695 24.075,45.695 IC3.23
NetIC3_24: IC3.24 SW2.1 | length 48.3
  Bottom Layer w0.5: SW2.1 5,17 10.094,22.094 10.094,41.906 15.188,47 22.84,47 IC3.24
NetIC3_27: IC3.27 RTC.1 | length 14.4
  Bottom Layer w0.5: RTC.1 5.08,53 14.84,53 IC3.27
NetIC3_28: IC3.28 RTC.2 | length 10.8
  Bottom Layer w0.5: RTC.2 14.76,50.54 IC3.28
NetLED_2: LED.2 R35.2 | length 48.9
  Top Layer w0.5: R35.2 74.031,33.591 88.622,19 94.945,19 109.73,4.215 LED.2
NetQ1_2: Q1.2 R1.2 R7.1 | length 10.5
  Top Layer w0.5: R7.1 R1.2 136.375,40.882 136,40.507 136,40.009 138.519,37.49 139.145,37.49 139.365,37.27 Q1.2
NetQ1_3: Q1.3 R18.1 | length 5
  Top Layer w0.5: R18.1 Q1.3
NetQ2_2: Q2.2 R2.2 R8.1 | length 11.3
  Top Layer w0.5: R8.1 R2.2 R2.2@148.375,41.036 ; Q2.2 150.53,37.27 148,39.8 R2.2@148,40.661 ; R2.2@148,40.661 R2.2@148.188,40.849 ; R2.2@148,40.661 R2.2@148.188,40.849 ; R2.2@148.188,40.849 R2.2@148.375,41.036 ; R2.2@148.188,40.849 R2.2@148.375,41.036
NetQ2_3: Q2.3 R17.1 | length 5
  Top Layer w0.5: R17.1 Q2.3
NetQ3_2: Q3.2 R3.2 R9.1 | length 10.7
  Top Layer w0.5: R9.1 156,41.104 160,41.104 160.027,41.05 R3.2@160.032,41.042 ; R3.2 R3.2@160.034,41.036 ; Q3.2 162.595,37.27 160.179,39.686 R3.2@160.179,40.751 ; R3.2@160.032,41.042 R3.2@160.034,41.036 ; R3.2@160.032,41.042 R3.2@160.179,40.751 ; R3.2@160.034,41.036 R3.2@160.179,40.751
NetQ3_3: Q3.3 R16.1 | length 5
  Top Layer w0.5: R16.1 Q3.3
NetQ4_2: Q4.2 R4.2 R10.1 | length 14.2
  Top Layer w0.5: R10.1 R10.1@168.018,41.018 ; Q4.2 174,37.27 172,39.27 R4.2 ; R10.1@168.018,41.018 171.982,41.018 R4.2 ; R10.1@168.018,41.018 168.036,41.036 R4.2
NetQ4_3: Q4.3 R15.1 | length 4.6
  Top Layer w0.5: R15.1 Q4.3
NetQ5_2: Q5.2 R5.2 R11.1 | length 10.4
  Top Layer w0.5: R11.1 R5.2 184.5,38.77 186,37.27 Q5.2
NetQ5_3: Q5.3 R14.1 | length 5
  Top Layer w0.5: R14.1 Q5.3
NetQ6_2: Q6.2 R6.2 R12.1 | length 10.2
  Top Layer w0.5: R12.1 R6.2 196,39 197.73,37.27 Q6.2
NetQ6_3: Q6.3 R13.1 | length 5
  Top Layer w0.5: R13.1 Q6.3
NetQ7_2: Q7.2 R19.1 | length 5
  Top Layer w0.5: R19.1 Q7.2
NetQ7_3: Q7.3 R7.2 | length 7.7
  Top Layer w0.5: R7.2 131.988,43.882 131.988,46.74 133.978,48.73 Q7.3
NetQ8_2: Q8.2 R20.1 | length 5
  Top Layer w0.5: R20.1 Q8.2
NetQ8_3: Q8.3 R8.2 | length 7.7
  Top Layer w0.5: R8.2 144,47 145.73,48.73 Q8.3
NetQ9_2: Q9.2 R21.1 | length 5
  Top Layer w0.5: R21.1 Q9.2
NetQ9_3: Q9.3 R9.2 | length 7.9
  Top Layer w0.5: R9.2 156,47.333 157.397,48.73 Q9.3
NetQ10_2: Q10.2 R22.1 | length 5
  Top Layer w0.5: R22.1 Q10.2
NetQ10_3: Q10.3 R10.2 | length 7.7
  Top Layer w0.5: R10.2 168,47 169.73,48.73 Q10.3
NetQ11_2: Q11.2 R23.1 | length 5
  Top Layer w0.5: R23.1 Q11.2
NetQ11_3: Q11.3 R11.2 | length 7.9
  Top Layer w0.5: R11.2 180,46.45 182.28,48.73 Q11.3
NetQ12_2: Q12.2 R24.1 | length 5
  Top Layer w0.5: R24.1 Q12.2
NetQ12_3: Q12.3 R12.2 | length 8.3
  Top Layer w0.5: R12.2 192.375,43.5 192,43.875 192,46.3 194.43,48.73 Q12.3
NetQ14_2: Q14.2 R29.3 | length 64.8
  Top Layer w0.5: Q14.2 94.645,53.699 93.595,52.649 93.595,39.865 123.46,10 R29.3
NetR27_2: R27.2 R29.2 | length 27.5
  Bottom Layer w0.5: R27.2 110.237,19.763 R29.2
NetR28_1: R28.1 R29.1 | length 26.5
  Top Layer w0.5: R28.1 119,23.863 119,16.46 128.54,6.92 R29.1
"Nixie 0": 
"Nixie 1": 
"Nixie 2": 
"Nixie 3": 
"Nixie 4": 
"Nixie 5": 
"Nixie 6": 
"Nixie 7": 
"Nixie 8": 
"Nixie 9": 
pads on no net: DC-IN.MH1 DC-IN.MH2 IC3.2 IC3.3 IC3.12 IC3.13 IC3.25 IC3.26

## Silkscreen, mask and mechanical layers (free items; w line width, h text height)
Bord_outline:
  the board outline again, w0.254